# Altium PCB DSC_card.PcbDoc
Units mil, origin at the board's own origin, x right, y up, seen from the top; angles counter-clockwise.
Board outline 6500 x 2750 mil, 2 copper layers (Top Layer, Bottom Layer); 96 components, 87 nets, 367 pads, 0 vias.
Unrouted connection lines stored in the file: 222.
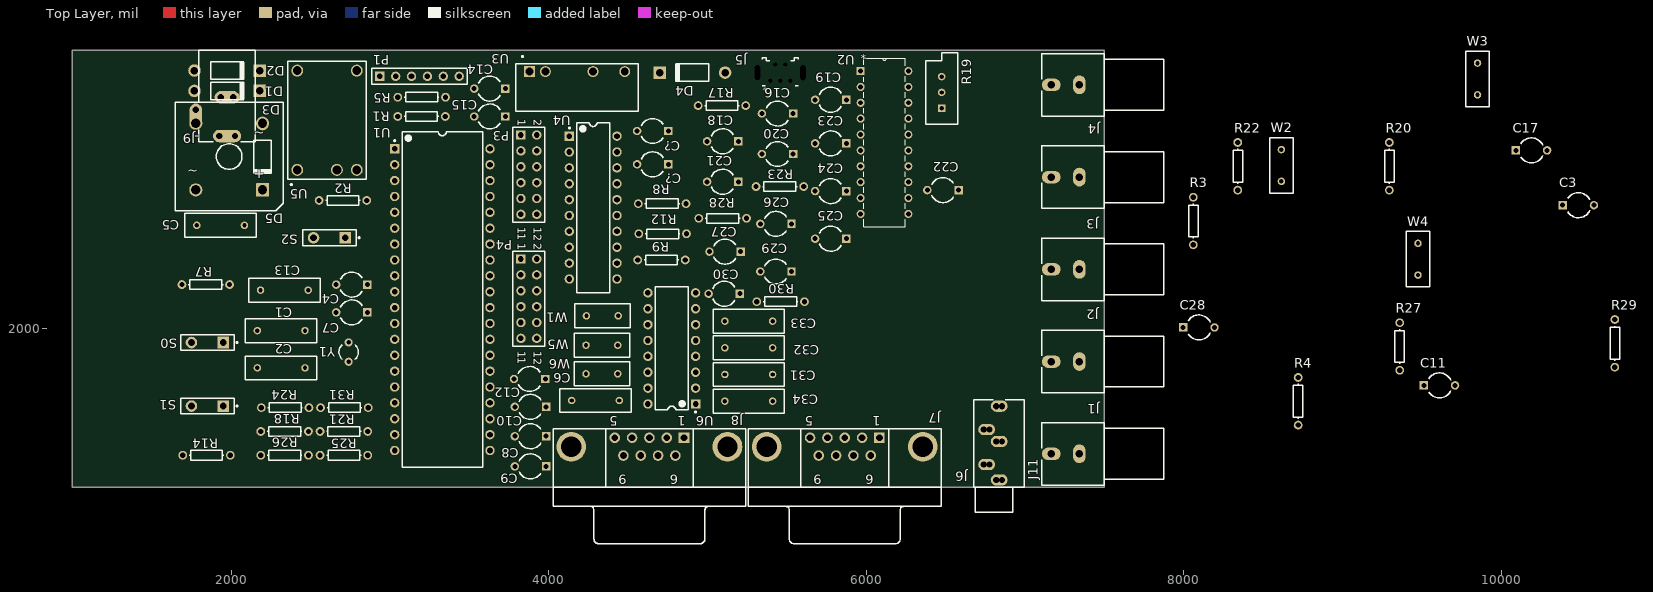
[diagram p0: Top Layer view]
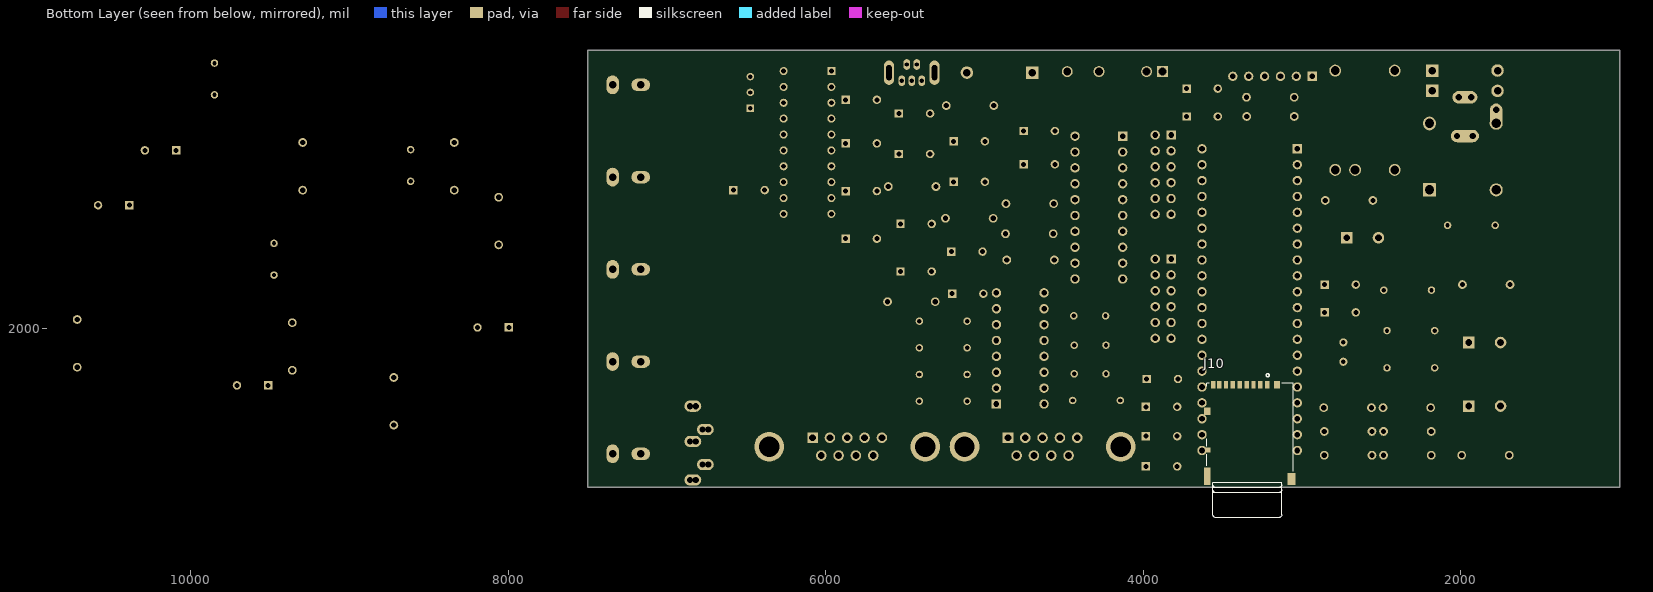
[diagram p1: Bottom Layer view, seen from below]

## Layer stack, top to bottom
Top Solder: solder mask 0.4, Solder Resist, Dk 3.5
Top Layer: signal copper 1.4
Dielectric 1: dielectric 12.6, FR-4, Dk 4.8
Bottom Layer: signal copper 1.4
Bottom Solder: solder mask 0.4, Solder Resist, Dk 3.5

## Board outline
1000,1000 1000,3750 7500,3750 7500,1000

## Design rules (kind name [scope] priority, off if disabled: settings)
Clearance [All] p1: gap=10
PolygonConnect [All] p1: connectstyle=Relief reliefconductorwidth=10 reliefentries=4 polygonreliefangle="90 Angle" airgapwidth=10
RoutingVias [All] p1: holewidth=28 width=50 viastyle="Through Hole" minholewidth=28 minwidth=50 maxholewidth=28 maxwidth=50
SolderMaskExpansion [All] p1: expansion=4
Width [All] p1: maxlimit=10 minlimit=10 preferedwidth=10
30 further rules are at their usual default settings.

## Components (designator, comment, footprint, x,y, rotation, side; value= is the part's Value field where it differs from the comment)
C1 "Cap" RAD-0.3 2315,1985 r0 top
C2 "Cap" RAD-0.3 2315,1750 r0 top
C3 "Cap2" CAPR5-4X5 10485,2775 r0 top
C4 "Cap2" CAPR5-4X5 2760,2275 r180 top
C5 "Cap" RAD-0.3 1933.86,2648.01 r180 top
C6 "Cap" RAD-0.3 4295,1545 r180 top
C7 "Cap2" CAPR5-4X5 2760,2099.64 r180 top
C8 "Cap2" CAPR5-4X5 3884.82,1320 r180 top
C9 "Cap2" CAPR5-4X5 3884.82,1130 r180 top
C10 "Cap2" CAPR5-4X5 3884.91,1505 r180 top
C11 "Cap2" CAPR5-4X5 9610,1640 r0 top
C12 "Cap2" CAPR5-4X5 3879.91,1680.36 r180 top
C13 "Cap" RAD-0.3 2335,2240 r180 top
C14 "Cap2" CAPR5-4X5 3629.18,3509.08 r180 top
C15 "Cap2" CAPR5-4X5 3629.18,3333.71 r180 top
C16 "Cap2" CAPR5-4X5 5440.94,3352.33 r180 top
C17 "Cap2" CAPR5-4X5 10190,3120 r0 top
C18 "Cap2" CAPR5-4X5 5095.94,3177.33 r180 top
C19 "Cap2" CAPR5-4X5 5776.51,3438.96 r180 top
C20 "Cap2" CAPR5-4X5 5440.94,3097.33 r180 top
C21 "Cap2" CAPR5-4X5 5095.94,2922.33 r180 top
C22 "Cap2" CAPR5-4X5 6483.11,2870 r180 top
C23 "Cap2" CAPR5-4X5 5776.51,3163.96 r180 top
C24 "Cap2" CAPR5-4X5 5776.51,2863.96 r180 top
C25 "Cap2" CAPR5-4X5 5776.51,2563.96 r180 top
C26 "Cap2" CAPR5-4X5 5430.94,2657.33 r180 top
C27 "Cap2" CAPR5-4X5 5110.94,2482.33 r180 top
C28 "Cap2" CAPR5-4X5 8095,2005 r0 top
C29 "Cap2" CAPR5-4X5 5430.94,2357.33 r180 top
C30 "Cap2" CAPR5-4X5 5105.94,2217.33 r180 top
C31 "Cap" RAD-0.3 5260,1708.68 r0 top
C32 "Cap" RAD-0.3 5260,1876.57 r0 top
C33 "Cap" RAD-0.3 5260,2044.45 r0 top
C34 "Cap" RAD-0.3 5260,1540.8 r0 top
C? "Cap2" CAPR5-4X5 4655,3032.34 r180 top
C? "Cap2" CAPR5-4X5 4655,3242.34 r180 top
D1 "Diode 11DQ03" DO-204AL 1974.81,3495 r0 top
D2 "Diode 11DQ03" DO-204AL 1974.81,3623.12 r0 top
D3 "Diode 11DQ03" DO-204AL 2197.54,3080 r270 top
D4 "Diode 11DQ03" DO-204AL 4905,3610 r180 top
D5 "Bridge2" D-46_6A 1987.5,3081.45 r180 top
J1 "RCA" RCA/4.5-H2 7500,1790 r0 top
J2 "RCA" RCA/4.5-H2 7500,2370.95 r0 top
J3 "RCA" RCA/4.5-H2 7500,2951.9 r0 top
J4 "RCA" RCA/4.5-H2 7500,3532.85 r0 top
J5 "5000750517" 5000750517 5458.3,3610 r0 top
J6 "Phonejack Stereo SW" ST-3150-5N 6803.75,840 r180 top
J7 "D Connector 9" DSUB1.385-2H9 5864.64,880 r180 top
J8 "D Connector 9" DSUB1.385-2H9 4634.16,880 r180 top
J9 "PWR2.5" KLD-0202 1974.31,3750 r270 top
J10 "DM3AT-SF-PEJM5" HRS_DM3AT-SF-PEJM5_DM3AT-SF-PEJM5(Primary) 3345,1645 r180 bottom
J11 "RCA" RCA/4.5-H2 7500,1209.05 r0 top
P1 "Header 6" HDR1X6 2936.24,3586.59 r0 top
P3 "Header 6X2" HDR2X6 3825,3217.01 r270 top
P4 "Header 6X2" HDR2X6 3824.91,2436.03 r270 top
R1 "Res1" AXIAL-0.3 3199.25,3333.71 r0 top
R2 "Res1" AXIAL-0.3 2703.86,2805 r180 top
R3 "Res1" AXIAL-0.3 8060,2675 r90 top
R4 "Res1" AXIAL-0.3 8720,1540 r90 top
R5 "Res1" AXIAL-0.3 3200,3455 r180 top
R7 "Res1" AXIAL-0.3 1840,2275 r0 top
R8 "Res1" AXIAL-0.3 4715,2785 r180 top
R9 "Res1" AXIAL-0.3 4710,2430 r0 top
R12 "Res1" AXIAL-0.3 4717.83,2595 r180 top
R14 "Res1" AXIAL-0.3 1845,1200 r0 top
R17 "Res1" AXIAL-0.3 5090.94,3402.33 r0 top
R18 "Res1" AXIAL-0.3 2336.78,1350 r180 top
R19 "RPot" VR5 6475,3485 r90 top
R20 "Res1" AXIAL-0.3 9295,3020 r90 top
R21 "Res1" AXIAL-0.3 2709.9,1350 r180 top
R22 "Res1" AXIAL-0.3 8340,3020 r90 top
R23 "Res1" AXIAL-0.3 5455.94,2892.33 r0 top
R24 "Res1" AXIAL-0.3 2340,1500 r0 top
R25 "Res1" AXIAL-0.3 2710,1200 r180 top
R26 "Res1" AXIAL-0.3 2336.78,1200 r180 top
R27 "Res1" AXIAL-0.3 9360,1885 r90 top
R28 "Res1" AXIAL-0.3 5095.94,2692.33 r0 top
R29 "Res1" AXIAL-0.3 10715,1905 r90 top
R30 "Res1" AXIAL-0.3 5460.94,2167.33 r0 top
R31 "Res1" AXIAL-0.3 2713.13,1500 r180 top
S0 "SW-SPST" SPST-2 1850,1910 r180 top
S1 "SW-SPST" SPST-2 1850,1510 r180 top
S2 "SW-SPST" SPST-2 2618.86,2570 r180 top
U1 "DSPIC30F4013-30I/P" PDIP600-P40 3330,2180 r0 top
U2 "TPA6021A4_N_20" N20 6265,2720 r0 top
U3 "DCH010505SN7" TI-EDJ4_V 4179.02,3616.32 r0 top
U4 "TP3071N-G" N20A 4280,2760 r0 top
U5 "PTN78000WAH" TI-EUS5_V 2603.79,3310 r90 top
U6 "MAX232EIN" TI-N16 4775,1872.88 r180 top
W1 "Jumper" RAD-0.2 4337.78,2077.88 r180 top
W2 "Jumper" RAD-0.2 8615,3025 r90 top
W3 "Jumper" RAD-0.2 9850,3570 r90 top
W4 "Jumper" RAD-0.2 9475,2435 r90 top
W5 "Jumper" RAD-0.2 4335,1892.88 r180 top
W6 "Jumper" RAD-0.2 4335,1712.88 r180 top
Y1 "XTAL" R38 2740,1850 r0 top

## Footprints (in the part's own frame and the unit in brackets; to place one, negate y for a bottom-side part, rotate by r counter-clockwise, add the part's x,y. Pads: shape width x height; smd on the part's side, far side on the other; paste and mask are expansions set on the pad)
5000750517 [mm] "Connector; USB Mini-B, Type 2, Thru-Hole; 5 Position; Vertical"
  round 0.4 / inner round 0.4 / far side oval 1.1x1.7 hole 0.7: 1(-1.6,-1.3) 2(-0.8,1.3) 3(0,-1.3) 4(0.8,1.3) 5(1.6,-1.3)
  oval 0.55x2.1 / inner oval 0.55x2.1 / far side oval 1.6x3.9 hole 0.85 slot 2.4 at 90 deg: 6(3.65,0) 7(-3.65,0)
  silkscreen extent -2.91,-2.77 2.91,2.4, body extent -3.85,-2.1 3.85,2.4, height 7.7
AXIAL-0.3 [mm] "Axial Device, Thru-Hole; 2 Leads; 0.3 in Pin Spacing"
  round 1.4 hole 0.85: 1(-3.81,0) 2(3.81,0)
  silkscreen extent -2.77,-0.76 2.77,0.76
CAPR5-4X5 [mm] "Capacitor; 2 Leads"
  rect 1.35x1.35 hole 0.8: 1(-2.5,0)
  round 1.35 hole 0.8: 2(2.5,0)
  silkscreen extent -1.69,-2 1.82,2
D-46_6A [mm] "Bridge Rectifier; 4 Terminals; Body 16.8 x 16.8 mm (typ); Pitch 10.67 mm"
  rect 2.1x2.1 hole 1.5: 1(-5.335,5.335)
  round 2.1 hole 1.5: 2(-5.335,-5.335) 3(5.335,-5.335) 4(5.335,5.335)
  silkscreen extent -8.65,-8.65 8.65,8.65, body extent -8.65,-8.65 8.65,8.65, height 6.35
DO-204AL [mm] "Diode, Axial; Body 5.2 x 2.7 mm (LxDia. max), Lead Dia. 0.86 mm (max)"
  round 2 hole 1.2: 1(-5.23,0)
  rect 2x2 hole 1.2: 2(5.23,0)
  silkscreen extent -2.65,-1.4 2.75,1.4
DSUB1.385-2H9 [mm] "Connector; D Subminiature; 9 Position; Right Angle; Pitch 1.385 mm"
  rect 1.69x1.69 hole 1.09: 1(-5.54,-10.92)
  round 1.69 hole 1.09: 2(-2.77,-10.92) 3(0,-10.92) 4(2.77,-10.92) 5(5.54,-10.92) 6(-4.155,-8.08) 7(-1.385,-8.08) 8(1.385,-8.08) 9(4.155,-8.08)
  round 4.76 hole 3.26: 10(-12.495,-9.5) 11(12.495,-9.5)
  silkscreen extent -15.4,-12.4 15.4,6
HDR1X6 [mm] "Connector; Header; 6 Position"
  rect 1.5x1.5 hole 0.9: 1(0,0)
  round 1.5 hole 0.9: 2(2.54,0) 3(5.08,0) 4(7.62,0) 5(10.16,0) 6(12.7,0)
  silkscreen extent -1.27,-1.27 13.97,1.27
HDR2X6 [mm] "Connector; Header; 6x2 Position"
  rect 1.5x1.5 hole 0.9: 1(0,0)
  round 1.5 hole 0.9: 2(0,2.54) 3(2.54,0) 4(2.54,2.54) 5(5.08,0) 6(5.08,2.54) 7(7.62,0) 8(7.62,2.54) 9(10.16,0) 10(10.16,2.54) 11(12.7,0) 12(12.7,2.54)
  silkscreen extent -1.27,-1.27 13.97,3.81
HRS_DM3AT-SF-PEJM5_DM3AT-SF-PEJM5(Primary) [mm]
  rect 0.7x1.2 smd paste-25.4 mask-25.4: 1(3.2,0) 2(2.1,0) 3(1,0) 4(-0.1,0) 5(-1.2,0) 6(-2.3,0) 7(-3.4,0) 8(-4.5,0) SWB(-5.45,0)
  rect 1x1.2 smd paste-25.4 mask-25.4: P1(-6.4,-4.3) P4(4.75,0)
  rect 1x2.8 smd paste-25.4 mask-25.4: P2(-6.4,-14.65)
  rect 1.3x1.9 smd paste-25.4 mask-25.4: P3(7.1,-15.1)
  rect 1x0.8 smd paste-25.4 mask-25.4: SWA(-6.4,-10.5)
  silkscreen extent -6.5,-21.3 7.35,1.75
KLD-0202 [mm] "DC Power Jack, 2.5mm, KLD Series, PCB Mount"
  oval 2x4.5 all layers, no hole: 1(13.7,0)
  round 1.5 hole 1: 1A(13.7,-1.25) 1B(13.7,1.25) 2A(7.5,-1) 2B(7.5,1) 3A(9.5,-5) 3B(11.5,-5)
  oval 2x4 all layers, no hole: 2(7.5,0)
  oval 4x2 all layers, no hole: 3(10.5,-5)
  silkscreen extent 0,-4.5 14.6,4.5
N20 [mil]
  rect 51x51 / inner round 60 / far side rect 51x51 hole 31: 1(-300,900)
  round 51 / inner round 60 / far side round 51 hole 31: 2(-300,800) 3(-300,700) 4(-300,600) 5(-300,500) 6(-300,400) 7(-300,300) 8(-300,200) 9(-300,100) 10(-300,0) 11(0,0) 12(0,100) 13(0,200) 14(0,300) 15(0,400) 16(0,500) 17(0,600) 18(0,700) 19(0,800) 20(0,900)
  silkscreen extent -280,-80 -20,980
N20A [mm] "DIP, 20-Pin, Row Spacing 7.62 mm, Pitch 2.54 mm"
  rect 1.5x1.5 hole 0.9: 1(-3.81,11.43)
  round 1.5 hole 0.9: 2(-3.81,8.89) 3(-3.81,6.35) 4(-3.81,3.81) 5(-3.81,1.27) 6(-3.81,-1.27) 7(-3.81,-3.81) 8(-3.81,-6.35) 9(-3.81,-8.89) 10(-3.81,-11.43) 11(3.81,-11.43) 12(3.81,-8.89) 13(3.81,-6.35) 14(3.81,-3.81) 15(3.81,-1.27) 16(3.81,1.27) 17(3.81,3.81) 18(3.81,6.35) 19(3.81,8.89) 20(3.81,11.43)
  silkscreen extent -3.93,-13.6 2.65,13.6, body extent -3.3,-13.57 3.3,13.57, height 5.08
PDIP600-P40 [mm] "DIP, 40-Leads, Row Spacing 15.24mm, Pitch 2.54mm, Body 51.8x13.5mm"
  rect 1.5x1.5 hole 0.9: 1(-7.62,24.13)
  round 1.5 hole 0.9: 2(-7.62,21.59) 3(-7.62,19.05) 4(-7.62,16.51) 5(-7.62,13.97) 6(-7.62,11.43) 7(-7.62,8.89) 8(-7.62,6.35) 9(-7.62,3.81) 10(-7.62,1.27) 11(-7.62,-1.27) 12(-7.62,-3.81) 13(-7.62,-6.35) 14(-7.62,-8.89) 15(-7.62,-11.43) 16(-7.62,-13.97) 17(-7.62,-16.51) 18(-7.62,-19.05) 19(-7.62,-21.59) 20(-7.62,-24.13) 21(7.62,-24.13) 22(7.62,-21.59) 23(7.62,-19.05) 24(7.62,-16.51) 25(7.62,-13.97) 26(7.62,-11.43) 27(7.62,-8.89) 28(7.62,-6.35) 29(7.62,-3.81) 30(7.62,-1.27) 31(7.62,1.27) 32(7.62,3.81) 33(7.62,6.35) 34(7.62,8.89) 35(7.62,11.43) 36(7.62,13.97) 37(7.62,16.51) 38(7.62,19.05) 39(7.62,21.59) 40(7.62,24.13)
  silkscreen extent -7.74,-26.85 6.45,26.85, body extent -7.3,-26.85 7.3,26.85, height 6.35
R38 [mm] "Crystal, Thru-Hole; 2 Leads; Body 3.1 x 8.2 mm (Dia.xH)"
  round 1.3 hole 0.7: 1(0,1.55) 2(0,-1.55)
  silkscreen extent -1.55,-1.19 1.55,1.17
RAD-0.2 [mm] "Radial Cap, Thru-Hole; 2 Leads; 0.2 in Pin Spacing"
  round 1.2 hole 0.7: 1(-2.54,0) 2(2.54,0)
  silkscreen extent -4.44,-1.91 4.44,1.91
RAD-0.3 [mm] "Radial Cap, Thru-Hole; 2 Leads; 0.3 in Pin Spacing"
  round 1.2 hole 0.7: 1(-3.81,0) 2(3.81,0)
  silkscreen extent -5.71,-1.91 5.71,1.91
RCA/4.5-H2 [mm] "Two Conductor Jack (RCA), Right Angle, Thru-Hole, Body 10 x 10 x 13 mm (WxTxH)"
  oval 2x3 hole 1.2: 1A(-4,0)
  oval 3x2 hole 1.2: 2B(-8.496,0)
  silkscreen extent -10.07,-5 9.5,5
SPST-2 [mm] "Switch; 2 Leads"
  rect 1.85x1.85 hole 1.1: 1(-2.54,0)
  round 1.85 hole 1.1: 2(2.54,0)
  silkscreen extent -4.89,-1.27 4.28,1.27
ST-3150-5N [mm] "Connector; Stereo Jack, 3.5mm, 5 Position"
  oval 2.7x1.8 all layers, no hole: 1(-0.85,-5.2) 2(1.15,-7.65) 3(-0.85,-11.35) 4(1.15,-13.25) 5(-0.85,-17)
  round 1.2 hole 1: 1A(-1.3,-5.2) 1B(-0.4,-5.2) 2A(0.7,-7.65) 2B(1.6,-7.65) 3A(-1.3,-11.35) 3B(-0.4,-11.35) 4A(0.7,-13.25) 4B(1.6,-13.25) 5A(-1.3,-17) 5B(-0.4,-17)
  silkscreen extent -4.9,-18 3.2,0
TI-EDJ4_V [mm] "Module, 4-Leads, Body 19.56x7.62mm"
  rect 1.75x1.75 hole 1.25: 1(-7.62,0)
  round 1.75 hole 1.25: 2(-5.08,0) 5(2.54,0) 7(7.62,0)
  silkscreen extent -9.78,-6.35 9.78,2.54, body extent -9.78,-6.35 9.78,1.27, height 10.15
TI-EUS5_V [mm] "5-Leads, Plastic Special Shape, Body 18.92x12.57mm"
  round 1.9 hole 1.4: 1(-7.94,4.76) 2(-7.94,-1.58) 3(-7.94,-4.76) 4(7.94,-4.76) 5(7.94,4.76)
  silkscreen extent -10.41,-6.28 9.46,6.28, body extent -9.46,-6.28 9.46,6.28, height 8.5
TI-N16 [mm] "DIP, 16-Leads, Row Spacing 7.62mm, Pitch 2.54mm, Body 19.3x6.4mm"
  rect 1.5x1.5 hole 0.9: 1(-3.81,8.89)
  round 1.5 hole 0.9: 2(-3.81,6.35) 3(-3.81,3.81) 4(-3.81,1.27) 5(-3.81,-1.27) 6(-3.81,-3.81) 7(-3.81,-6.35) 8(-3.81,-8.89) 9(3.81,-8.89) 10(3.81,-6.35) 11(3.81,-3.81) 12(3.81,-1.27) 13(3.81,1.27) 14(3.81,3.81) 15(3.81,6.35) 16(3.81,8.89)
  silkscreen extent -3.94,-9.85 2.65,10.31, body extent -3.3,-9.85 3.3,9.85, height 5.08
VR5 [mm] "Thru-Hole; 3 Leads"
  rect 1.2x1.2 hole 0.7: 1(-2.54,0)
  round 1.2 hole 0.7: 2(0,0) 3(2.54,0)
  silkscreen extent -5.08,-2.54 6.35,2.54

## Part data
C1 C2 C3 C4 C5 C6 C7 C8 C9 C10 C11 C12 C13 C14 C15 C16 C17 C18 C19 C20 C21 C22 C23 C24 C25 C26 C27 C28 C29 C30 C31 C32 C33 C34 C? C?: "Capacitor"
D1 D2 D3 D4: "Schottky Rectifier"
D5: "Diode Bridge"
J1 J2 J3 J4 J11: "RCA Phono Jack, Right Angle, Thru-Hole, Snap-In"
J5: "USB On-The-Go (OTG) Mini-B Receptacle, Right Angle, Thru-Hole, 0.80mm (.031\") Pitch, Solder Tails & Shell Tabs with Dimples"
J6: "3-Conductor Jack with 2 break contacts (normals) and 2 auxiliary make contacts"
J7 J8: "Receptacle Assembly, 9 Position, Right Angle"
J9: "Low Voltage Power Supply Connector"
J10: "DM3%20Series%208%20Position%20Right%20Angle%20SMT%20Push%20Push%20Ejection%20MicroSD%20Card%20Connector"
P1: "Header, 6-Pin"
P3 P4: "Header, 6-Pin, Dual row"
R1 R2 R3 R4 R5 R7 R8 R9 R12 R14 R17 R18 R20 R21 R22 R23 R24 R25 R26 R27 R28 R29 R30 R31: "Resistor"
R19: "Potentiometer"
S0 S1 S2: "Single-Pole, Single-Throw Switch"
U1: "High-Performance 16-bit Digital Signal Controller, 48 KB Flash, 2 KB SRAM, 1 KB EEPROM, 40-Pin PDIP, Industrial Temperature"
U2: "Imported"
U3: "Miniature, 1 W, 3 kVDC Isolated DC-DC Converter, -40 to 85 degC, 4-pin Module (EDJ4), Pb-Free (RoHS)"
U4: "COMBO II Programmable PCM CODEC/Filter, 20-pin MDIP"
U5: "1.5 A, Wide-Input Adjustable Switching Regulator, -40 to 85 degC, 5-pin Module (EUS5), Pb-Free (RoHS)"
U6: "Dual RS-232 Driver / Receiver with IEC61000-4-2 Protection, -40 to 85 degC, 16-Pin PDIP (N),  Pb-Free (RoHS)"
W1 W2 W3 W4 W5 W6: "Jumper Wire"
Y1: "Crystal Oscillator"

## Nets (pads, with @x,y where several pads share a name; then routed paths per layer and width w, separated by ;. In a path a pad name is that pad's centre, name@x,y a point inside that pad or via, vN(x,y) a via of type N, cw(c..) or ccw(c..) an arc to the next point about the centre after c; other vN are vias at no path point)
AGND: C6.2 C19.2 C22.2 C23.2 C24.2 C25.2 C33.2 C34.2 C?.2 J1.1A J2.1A J3.1A J4.1A J6.1 J6.1A J6.1B J7.1 J7.10 J7.11 J8.1 J8.10 J8.11 J11.1A P3.12 R4.2 R9.2 R19.2 R22.1 R29.1 U1.39 U2.1 U2.11 U2.15 U2.17 U3.2 U3.7 U4.1 U6.15 W3.2
ANA_IN: P4.12 U4.20
ANA_MIC: C11.2 J6.5 J6.5A J6.5B P4.11 R3.2 R4.1 U1.10
BCLK: P3.4 U4.12
BRESET_N: C13.1 P1.1 R1.1 R2.1 U1.1 U2.14 U5.3
BYPASS: C22.1 U2.16
C1_N: C31.1 U6.3
C1_P: C31.2 U6.1
C2_N: C32.2 U6.5
C2_P: C32.1 U6.4
CS_N: J10.2 R24.2
CSCK: P4.10 U4.9
CSDI: P4.6 R12.2 U4.8
CSDO: P4.8 R12.1
DGND: C1.1 C2.1 C3.2 C4.2 C5.2 C7.2 C8.2 C9.2 C10.2 C12.2 C13.2 C14.2 C15.2 C18.2 C21.2 C27.2 C30.2 D5.3 D5.4 J5.5 J5.6 J5.7 J9.1 J9.1A J9.1B J9.3 J9.3A J9.3B J10.6 P1.3 P3.11 R5.1 R24.1 R25.1 R26.1 R31.2 S0.1 S1.1 S2.1 U1.12 U1.20 U1.31 U5.1 W3.1
DSR1RXD2: U1.27 U6.10
DTR1TXD2: U1.28 U6.9
FB4V7: R5.2 U5.4
FS: P3.10 P4.1 P4.3
FSR: P4.2 U4.6
FSX: P4.4 U4.15
HP_L: C28.2 J6.2 J6.2A J6.2B R29.2
HP_PRESENT_N: J6.3 J6.3A J6.3B R20.1 R27.1
HP_R: C17.2 J6.4 J6.4A J6.4B R22.2
I2S_LRCLK: P3.9 U1.35
I2S_SCK: P3.3 U1.38
I2S_SDI: P3.5 U1.37
I2S_SDO: P3.7 U1.36
INT0RTS: U1.17
INT1ATN: U1.23
INT2RXC: U1.18 W6.2
L_N: C26.2 C27.1 R28.2
L_P: C29.2 C30.1 R30.2
LIN_N: C26.1 U2.7
LIN_P: C29.1 U2.8
LOUT_N: J2.2B U2.10
LOUT_P: C28.1 J1.2B U2.12
MONO_AMP: U2.20 W2.1
MONO_CODEC: U4.2 W4.2
NetC11_1: C11.1 J11.2B
NetR8_2: R8.2 U4.11
NetR9_1: R9.1 U4.10
OSC1: C1.2 U1.13 Y1.1
OSC2: C2.2 U1.14 Y1.2
P6: P1.5
P7: P1.4
PB0: R7.1 S0.2 U1.30
PB1: R14.1 S1.2 U1.29
PWML_N: R28.1 U1.22
PWML_P: R30.1 U1.19
PWMR_N: R23.1 U1.33
PWMR_P: R17.1 U1.34
R_N: C20.2 C21.1 R23.2
R_P: C16.2 C18.1 R17.2
RIN_N: C20.1 U2.5
RIN_P: C16.1 U2.4
ROUT_N: J3.2B U2.2
ROUT_P: C17.1 J4.2B W2.2 W4.1
RST_BTN: R2.2 S2.2
RVOL: R19.3 U2.18
RXD: U1.15 W1.2
RXD1: U6.11 W1.1
RXD1HV: J8.3 U6.14
RXD2HV: J7.3 U6.7
SCK: P4.9 R21.1 U1.24
SCLK3V: J10.5 R21.2 R25.2
SDETECT: J10.SWB R31.1 W6.1
SDI: J10.3 P4.5 U1.26
SDIN: P3.6 U4.13
SDO: P4.7 R18.1 U1.25
SDO3V: J10.7 R18.2 R26.2
SDOUT: P3.8 U4.7
SE_BTL_N: R27.2 U2.19
TXD: U1.16 W5.2
TXD1: U6.12 W5.1
TXD1HV: J8.2 U6.13
TXD2HV: J7.2 U6.8
VAC8V7: D1.2 D2.2 D3.1 D5.2 J9.2 J9.2A J9.2B
VAC9V0_1: D1.1
VAC9V0_2: D2.1
VCODEC_N: C?.1@4753.43,3242.34 U3.5 U4.3
VCODEC_P: C?.1@4753.43,3032.34 P3.2 R8.1 U3.1 U4.19
VDD4V7A: C3.1 C6.1 C14.1 C15.1 C19.1 C23.1 C24.1 C25.1 D4.1 J5.1 P3.1 R3.1 R19.1 R20.2 U1.40 U2.3 U2.6 U2.9 U5.5 U6.16
VDD5V0: C4.1 C7.1 C8.1 C9.1 C10.1 C12.1 D4.2 J10.SWA P1.2 R1.2 R7.2 R14.2 U1.11 U1.21 U1.32
VDD8V3: C5.1 D3.2 D5.1 U5.2
VS_N: C33.1 U6.6
VS_P: C34.1 U6.2
pads on no net: J5.2 J5.3 J5.4 J7.4 J7.5 J7.6 J7.7 J7.8 J7.9 J8.4 J8.5 J8.6 J8.7 J8.8 J8.9 J10.1 J10.4 J10.8 J10.P1 J10.P2 J10.P3 J10.P4 P1.6 U1.2 U1.3 U1.4 U1.5 U1.6 U1.7 U1.8 U1.9 U2.13 U4.4 U4.5 U4.14 U4.16 U4.17 U4.18

## Silkscreen, mask and mechanical layers (free items; w line width, h text height)
Mechanical 1:
  the board outline again, w0.04

## Text inside footprints (layer, text, board x,y; h text height)
D5: Top Overlay "+" at 2212.82,2996.13 h59.06 r180; Top Overlay "-" at 1797.54,3231.41 h59.06 r180; Top Overlay "~" at 1792.82,3016.13 h59.06 r180; Top Overlay "~" at 2212.82,3256.13 h59.06 r180
J1: Mechanical 1 "PCB Edge" at 7486.89,1608.2 h9.84 r90; Mechanical 1 "Alert PCB fab to slot details" at 7104.07,2098.74 h11.81; Mechanical 1 "Slot 1.2x2.2mm, PTH" at 7104.07,2079.06 h11.81; Mechanical 1 "Assign keep-out area to slot" at 7104.07,2118.43 h11.81; Mechanical 1 "Mech 1 - Slot cut-out" at 7104.07,2059.37 h11.81; Mechanical 1 "Mech 2 - Clearance, move to internal plane if present" at 7104.07,2039.68 h11.81
J2: Mechanical 1 "PCB Edge" at 7486.89,2189.15 h9.84 r90; Mechanical 1 "Alert PCB fab to slot details" at 7104.07,2679.69 h11.81; Mechanical 1 "Slot 1.2x2.2mm, PTH" at 7104.07,2660.01 h11.81; Mechanical 1 "Assign keep-out area to slot" at 7104.07,2699.38 h11.81; Mechanical 1 "Mech 1 - Slot cut-out" at 7104.07,2640.32 h11.81; Mechanical 1 "Mech 2 - Clearance, move to internal plane if present" at 7104.07,2620.64 h11.81
J3: Mechanical 1 "PCB Edge" at 7486.89,2770.1 h9.84 r90; Mechanical 1 "Alert PCB fab to slot details" at 7104.07,3260.64 h11.81; Mechanical 1 "Slot 1.2x2.2mm, PTH" at 7104.07,3240.96 h11.81; Mechanical 1 "Assign keep-out area to slot" at 7104.07,3280.33 h11.81; Mechanical 1 "Mech 1 - Slot cut-out" at 7104.07,3221.27 h11.81; Mechanical 1 "Mech 2 - Clearance, move to internal plane if present" at 7104.07,3201.59 h11.81
J4: Mechanical 1 "PCB Edge" at 7486.89,3351.05 h9.84 r90; Mechanical 1 "Alert PCB fab to slot details" at 7104.07,3841.59 h11.81; Mechanical 1 "Slot 1.2x2.2mm, PTH" at 7104.07,3821.91 h11.81; Mechanical 1 "Assign keep-out area to slot" at 7104.07,3861.28 h11.81; Mechanical 1 "Mech 1 - Slot cut-out" at 7104.07,3802.22 h11.81; Mechanical 1 "Mech 2 - Clearance, move to internal plane if present" at 7104.07,3782.54 h11.81
J6: Mechanical 1 "Mech 2 - Clearance, move to internal plane if present" at 7088.23,825.28 h11.81 r180; Mechanical 1 "Mech 1 - Slot cut-out" at 7088.23,805.59 h11.81 r180; Mechanical 1 "Assign keep-out area to slot" at 7088.23,746.54 h11.81 r180; Mechanical 1 "Slot 1x1.9mm, PTH" at 7088.23,785.91 h11.81 r180; Mechanical 1 "Alert PCB fab to slot details" at 7088.23,766.22 h11.81 r180
J7: Top Overlay "6" at 6047.91,1075.87 h59.06 r180; Top Overlay "9" at 5720.74,1075.87 h59.06 r180; Top Overlay "5" at 5666.21,1445.94 h59.06 r180; Top Overlay "1" at 6092.59,1445.94 h59.06 r180
J8: Top Overlay "6" at 4817.43,1075.87 h59.06 r180; Top Overlay "9" at 4490.26,1075.87 h59.06 r180; Top Overlay "5" at 4435.73,1445.94 h59.06 r180; Top Overlay "1" at 4862.11,1445.94 h59.06 r180
J9: Mechanical 1 "Mech 2 - Clearance, move to internal plane if present" at 2173.76,3738.74 h11.81 r270; Mechanical 1 "Mech 1 - Slot cut-out" at 2193.44,3738.74 h11.81 r270; Mechanical 1 "Assign keep-out area to slot" at 2232.81,3738.74 h11.81 r270; Mechanical 1 "Alert PCB fab to slot details" at 2213.13,3738.74 h11.81 r270
J11: Mechanical 1 "PCB Edge" at 7486.89,1027.25 h9.84 r90; Mechanical 1 "Alert PCB fab to slot details" at 7104.07,1517.79 h11.81; Mechanical 1 "Slot 1.2x2.2mm, PTH" at 7104.07,1498.1 h11.81; Mechanical 1 "Assign keep-out area to slot" at 7104.07,1537.47 h11.81; Mechanical 1 "Mech 1 - Slot cut-out" at 7104.07,1478.42 h11.81; Mechanical 1 "Mech 2 - Clearance, move to internal plane if present" at 7104.07,1458.73 h11.81
P3: Top Overlay "12" at 3905,2637.01 h50 r270; Top Overlay "1" at 3805,2597.01 h50 r270; Top Overlay "1" at 3805,2637.01 h50 r270; Top Overlay "1" at 3805,3317.01 h50 r270; Top Overlay "2" at 3905,3317.01 h50 r270
P4: Top Overlay "12" at 3904.91,1856.03 h50 r270; Top Overlay "1" at 3804.91,1816.03 h50 r270; Top Overlay "1" at 3804.91,1856.03 h50 r270; Top Overlay "1" at 3804.91,2536.03 h50 r270; Top Overlay "2" at 3904.91,2536.03 h50 r270
U2: Top Overlay "*" at 5965,3675.5 h50; Mechanical 1 "*" at 5965,3675.5 h50